# Altium PCB BLDC_PCB.PcbDoc
Units mm, origin at the board's own origin, x right, y up, seen from the top; angles counter-clockwise.
Board outline 85 x 100 mm, 2 copper layers (Top Layer, Bottom Layer); 61 components, 40 nets, 155 pads, 0 vias.
Unrouted connection lines stored in the file: 102.
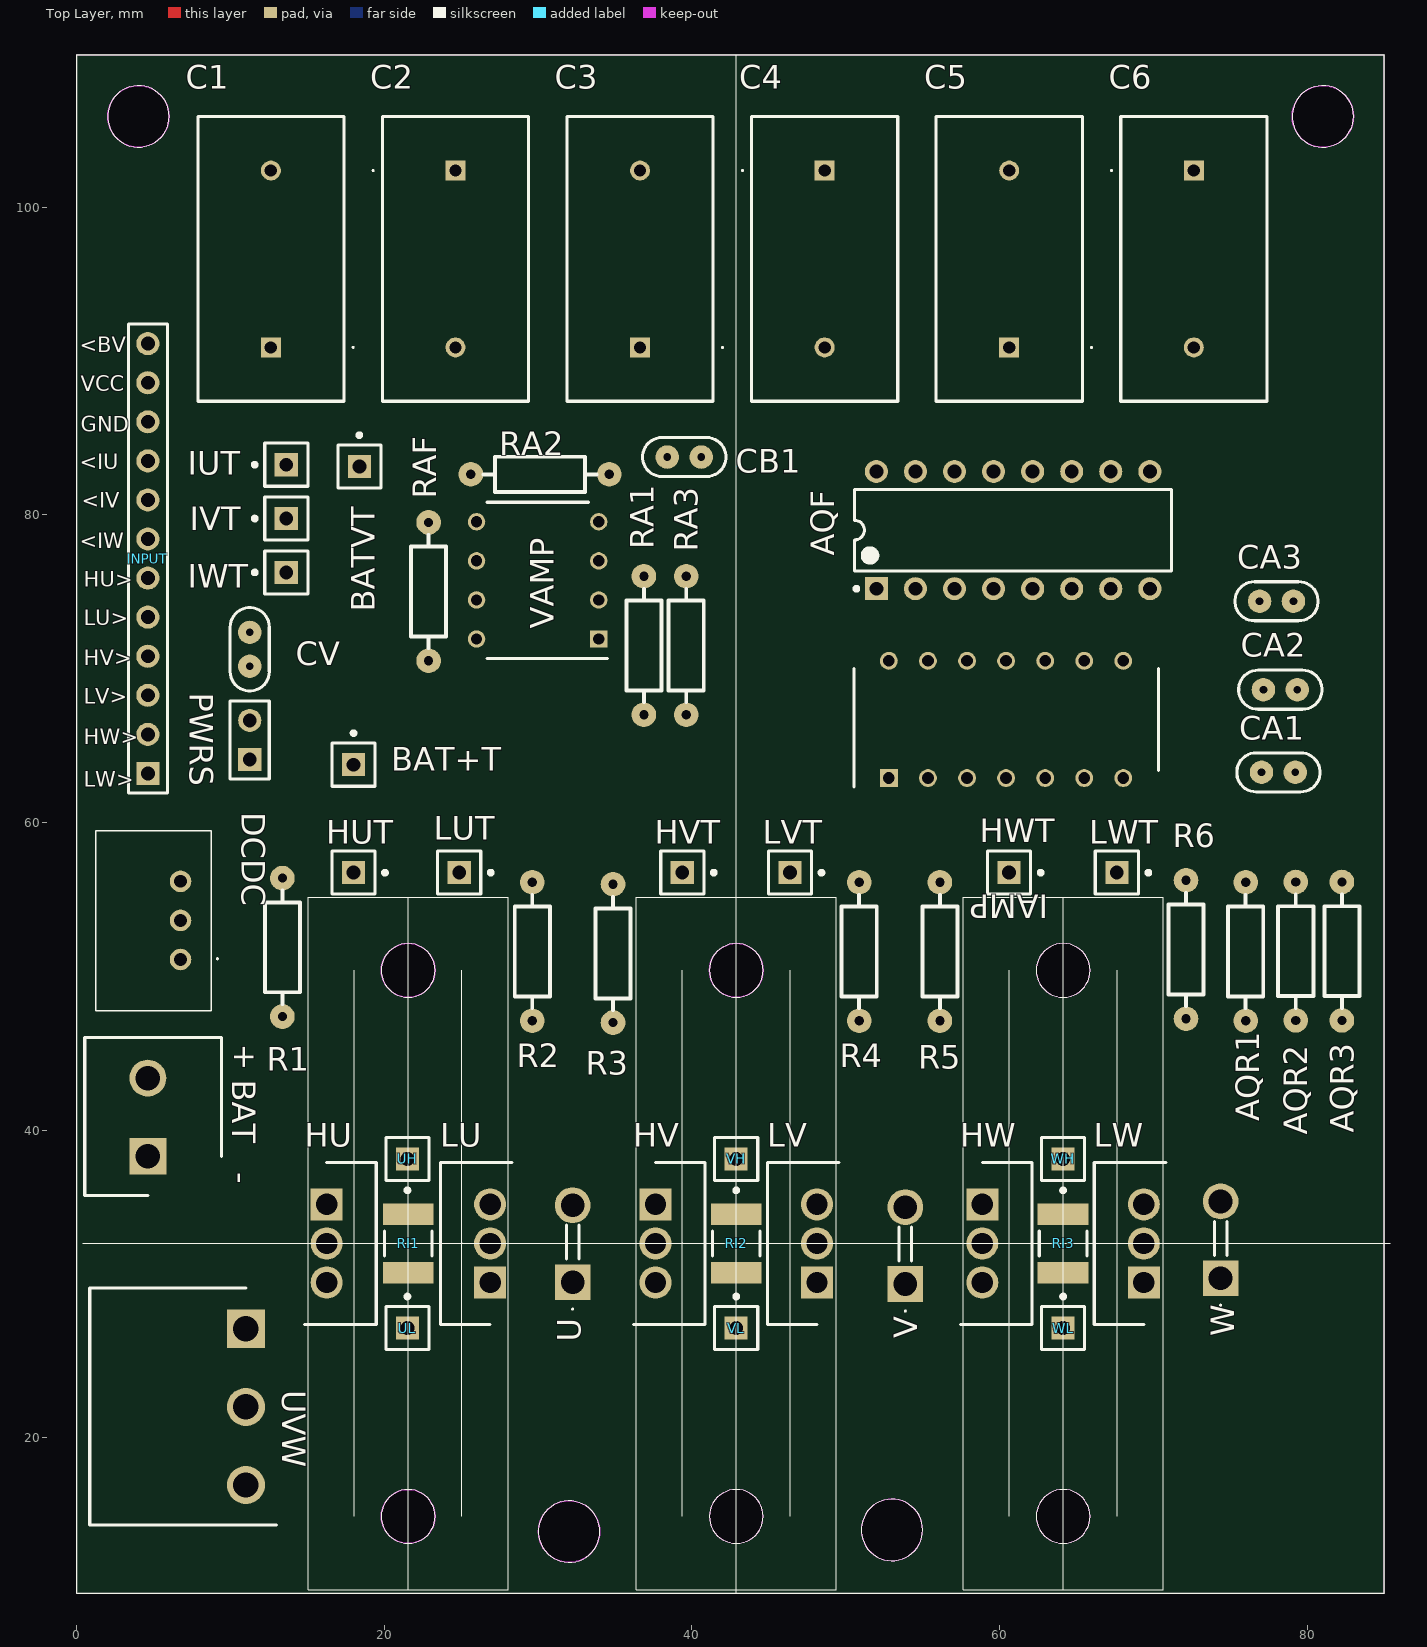
[diagram p0: Top Layer view]
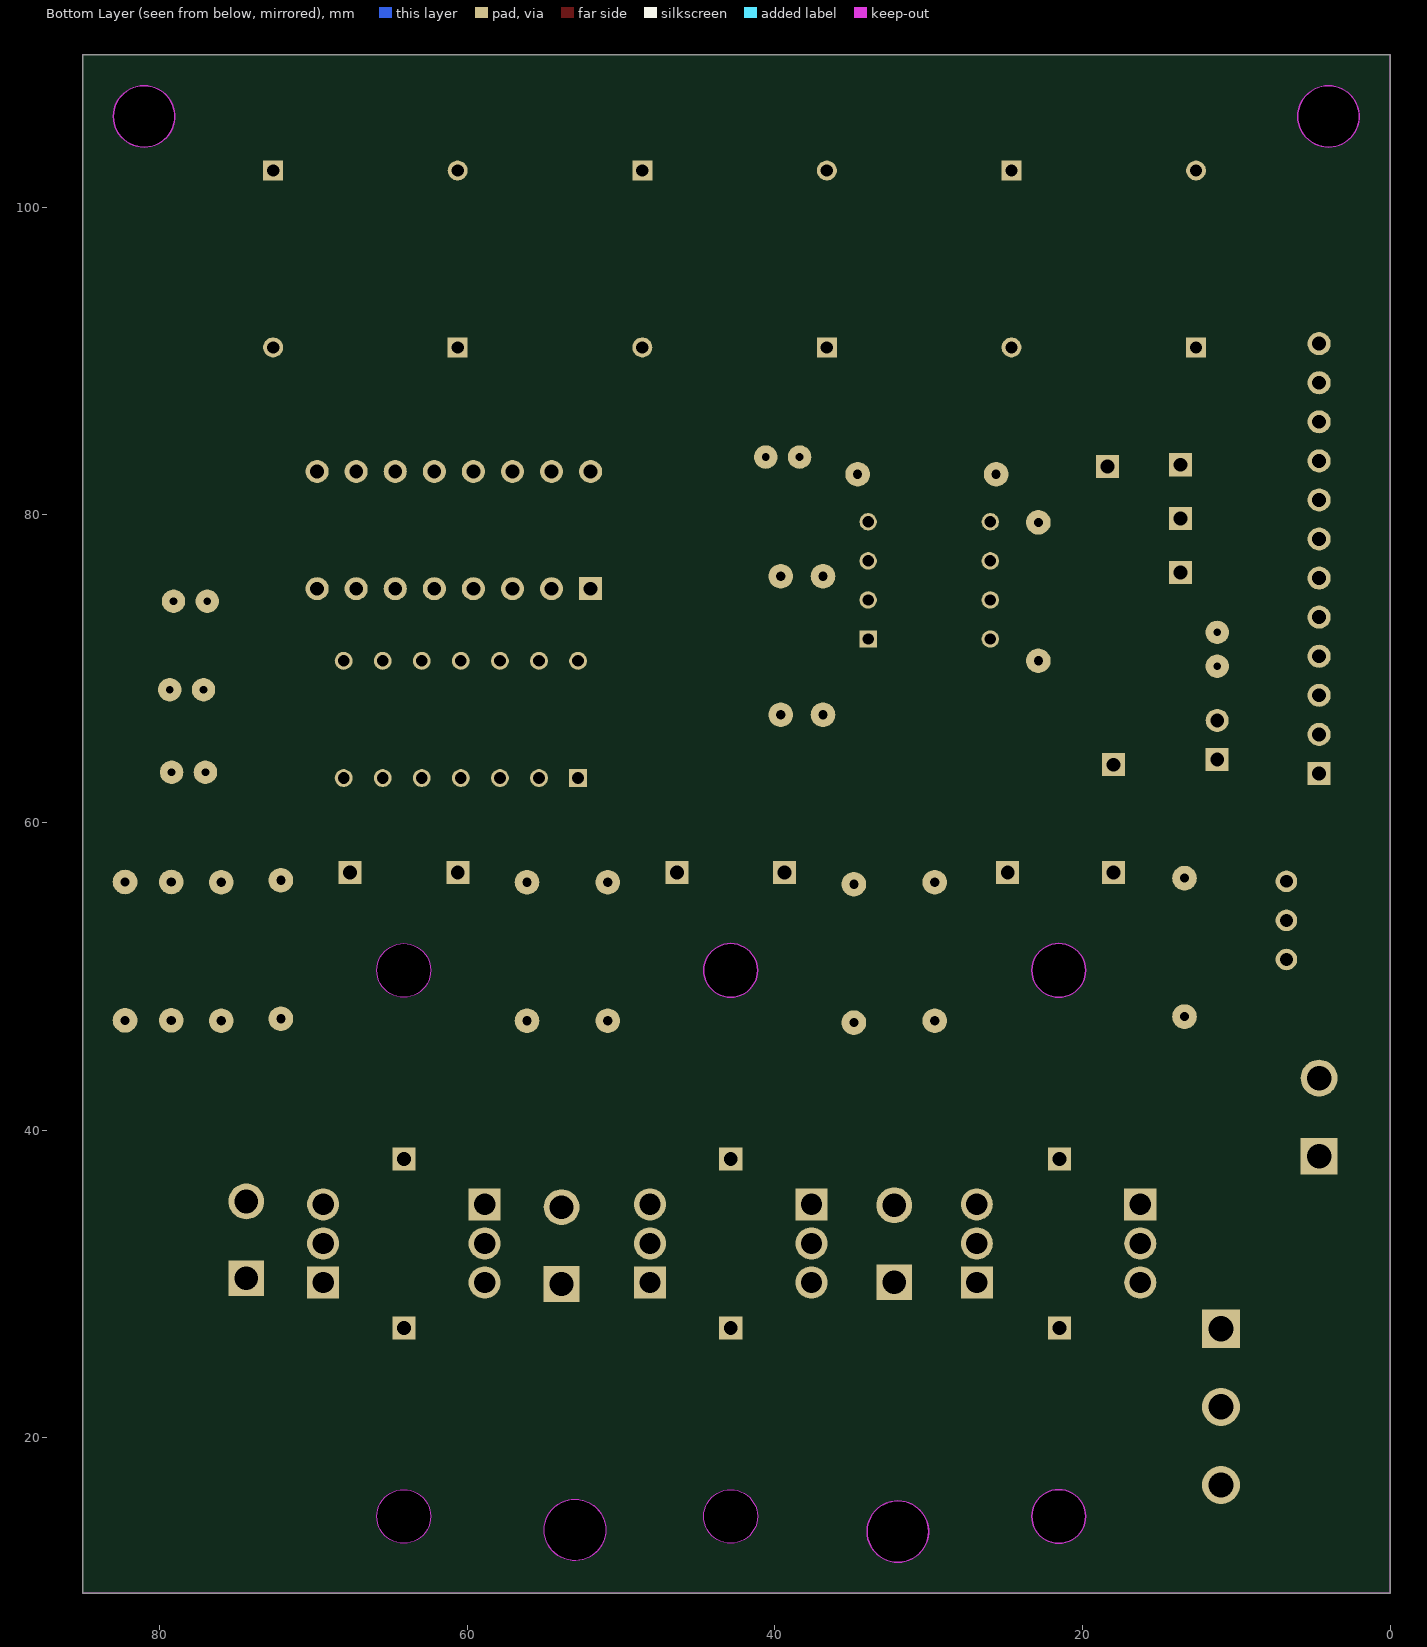
[diagram p1: Bottom Layer view, seen from below]

## Layer stack, top to bottom
Top Solder: solder mask 0.0102, Solder Resist, Dk 3.5
Top Layer: signal copper 0.0356
Dielectric 1: dielectric 0.32, FR-4, Dk 4.8
Bottom Layer: signal copper 0.0356
Bottom Solder: solder mask 0.0102, Solder Resist, Dk 3.5

## Board outline
0.013,9.893 0.013,109.893 85.013,109.893 85.013,9.893
cut-out: 62.381,14.875 ccw(c64.131,14.875) 64.131,13.125 ccw(c64.131,14.875) 65.881,14.875 ccw(c64.131,14.875) 64.131,16.625 ccw(c64.131,14.875)
cut-out: 41.131,14.875 ccw(c42.881,14.875) 42.881,13.125 ccw(c42.881,14.875) 44.631,14.875 ccw(c42.881,14.875) 42.881,16.625 ccw(c42.881,14.875)
cut-out: 21.548,13.125 cw(c21.548,14.875) 19.798,14.875 cw(c21.548,14.875) 21.548,16.625 cw(c21.548,14.875) 23.298,14.875 cw(c21.548,14.875)
cut-out: 62.381,50.375 ccw(c64.131,50.375) 64.131,48.625 ccw(c64.131,50.375) 65.881,50.375 ccw(c64.131,50.375) 64.131,52.125 ccw(c64.131,50.375)
cut-out: 42.881,48.625 cw(c42.881,50.375) 41.131,50.375 cw(c42.881,50.375) 42.881,52.125 cw(c42.881,50.375) 44.631,50.375 cw(c42.881,50.375)
cut-out: 21.548,48.625 cw(c21.548,50.375) 19.798,50.375 cw(c21.548,50.375) 21.548,52.125 cw(c21.548,50.375) 23.298,50.375 cw(c21.548,50.375)
cut-out: 51,14 ccw(c53,14) 53,12 ccw(c53,14) 55,14 ccw(c53,14) 53,16 ccw(c53,14)
cut-out: 32.013,11.893 cw(c32.013,13.893) 30.013,13.893 cw(c32.013,13.893) 32.013,15.893 cw(c32.013,13.893) 34.013,13.893 cw(c32.013,13.893)
cut-out: 81.013,103.893 cw(c81.013,105.893) 79.013,105.893 cw(c81.013,105.893) 81.013,107.893 cw(c81.013,105.893) 83.013,105.893 cw(c81.013,105.893)
cut-out: 4.013,103.893 cw(c4.013,105.893) 2.013,105.893 cw(c4.013,105.893) 4.013,107.893 cw(c4.013,105.893) 6.013,105.893 cw(c4.013,105.893)

## Design rules (kind name [scope] priority, off if disabled: settings)
Clearance [All] p1: gap=0.25 ignorepadtopadclearanceinfootprint=FALSE
PolygonConnect [All] p1: connectstyle=Relief reliefconductorwidth=0.254 reliefentries=4 polygonreliefangle="90 Angle" airgapwidth=0.254
RoutingVias [All] p1: holewidth=0.711 width=1.27 viastyle="Through Hole" minholewidth=0.711 minwidth=1.27 maxholewidth=0.711 maxwidth=1.27
SolderMaskExpansion [All] p1: expansion=0.102 istentingtop=FALSE
Width Width-BAT [InNet('BAT+')] p1: maxlimit=5 minlimit=1 preferedwidth=2
Width Width-BAT_1 [InNet('BAT-')] p2: maxlimit=5 minlimit=1 preferedwidth=2
Width [All] p3: maxlimit=5 minlimit=0.5 preferedwidth=0.5
30 further rules are at their usual default settings.

## Components (designator, comment, footprint, x,y, rotation, side; value= is the part's Value field where it differs from the comment)
AQF "Res Pack2" DIP-16 60.875,79 r90 top value=22K
AQR1 "Res2" "RS 1/4W" 75.994,51.608 r90 top value=1.1K
AQR2 "Res2" "RS 1/4W" 79.25,51.625 r90 top value=1.1K
AQR3 "Res2" "RS 1/4W" 82.25,51.625 r90 top value=1.1K
BAT "1757242" SHDR2W100P0X508_1X2_1016X860X1250P 4.625,38.295 r90 top
BAT+T "Test" PIN1 18,63.75 r0 top
BATVT "Test" PIN1 18.375,83.125 r0 top
C1 "SCMR22H155PSBB0" SCMR22H155PSBB0 12.625,90.875 r180 top
C2 "SCMR22H155PSBB0" SCMR22H155PSBB0 24.625,102.375 r0 top
C3 "SCMR22H155PSBB0" SCMR22H155PSBB0 36.625,90.875 r180 top
C4 "SCMR22H155PSBB0" SCMR22H155PSBB0 48.625,102.375 r0 top
C5 "SCMR22H155PSBB0" SCMR22H155PSBB0 60.625,90.875 r180 top
C6 "SCMR22H155PSBB0" SCMR22H155PSBB0 72.625,102.375 r0 top
CA1 "Cap" "CC 2.2*5" 78.125,63.25 r180 top value=100pF
CA2 "Cap" "CC 2.2*5" 78.25,68.625 r180 top value=100pF
CA3 "Cap" "CC 2.2*5" 78,74.375 r180 top value=100pF
CB1 "Cap" "CC 2.2*5" 39.5,83.75 r0 top value=47UF
CV "Cap" "CC 2.2*5" 11.25,71.25 r90 top value=47UF
DCDC "TSR_1-2450E" TSR12450E 6.75,51.085 r90 top
HU "IRL520PBF" TO254P465X1024X2050-3P 16.25,35.165 r270 top
HUT "Test" PIN1 17.994,56.733 r270 top
HV "IRL520PBF" TO254P465X1024X2050-3P 37.625,35.165 r270 top
HVT "Test" PIN1 39.369,56.733 r270 top
HW "IRL520PBF" TO254P465X1024X2050-3P 58.875,35.165 r270 top
HWT "Test" PIN1 60.619,56.733 r270 top
IAMP "LM324N" DIP762W56P254L1980H508Q14N 60.42,66.69 r90 top
INPUT "Header 12" HDR1X12 4.625,63.18 r90 top
IUT "Test" PIN1 13.625,83.25 r90 top
IVT "Test" PIN1 13.625,79.75 r90 top
IWT "Test" PIN1 13.625,76.25 r90 top
LU "IRL520PBF" TO254P465X1024X2050-3P 26.875,30.085 r90 top
LUT "Test" PIN1 24.869,56.733 r270 top
LV "IRL520PBF" TO254P465X1024X2050-3P 48.125,30.085 r90 top
LVT "Test" PIN1 46.369,56.733 r270 top
LW "IRL520PBF" TO254P465X1024X2050-3P 69.375,30.085 r90 top
LWT "Test" PIN1 67.619,56.733 r270 top
PWRS "Header 2" HDR1X2 11.25,64.085 r90 top
R1 "Res2" "RS 1/4W" 13.375,51.875 r90 top value=4.7K
R2 "Res2" "RS 1/4W" 29.619,51.608 r90 top value=4.7K
R3 "Res2" "RS 1/4W" 34.869,51.483 r90 top value=4.7K
R4 "Res2" "RS 1/4W" 50.869,51.608 r90 top value=4.7K
R5 "Res2" "RS 1/4W" 56.119,51.608 r90 top value=4.7K
R6 "Res2" "RS 1/4W" 72.119,51.733 r90 top value=4.7K
RA1 "Res2" "RS 1/4W" 36.875,71.5 r90 top value=100K
RA2 "Res2" "RS 1/4W" 30.125,82.625 r0 top value=100K
RA3 "Res2" "RS 1/4W" 39.625,71.5 r270 top value=10K
RAF "Res2" "RS 1/4W" 22.875,75 r270 top value=10K
RI1 "Res2" 1812 21.548,32.625 r270 top value=0.01ohm
RI2 "Res2" 1812 42.878,32.625 r270 top value=0.01ohm
RI3 "Res2" 1812 64.125,32.625 r270 top value=0.01ohm
U "2376595-2" 23765952 32.244,30.108 r90 top
UH "Socket" PIN1 21.5,38.125 r180 top
UL "Socket" PIN1 21.5,27.125 r0 top
UVW "1785955" SHDRRA3W103P0X508_1X3_1524X1200X872P 11,27.08 r90 top
V "2376595-2" 23765952 53.869,29.983 r90 top
VAMP "OPA445AP" DIP794W53P254L959H508Q8N 29.97,75.73 r180 top
VH "Socket" PIN1 42.875,38.125 r180 top
VL "Socket" PIN1 42.875,27.125 r0 top
W "2376595-2" 23765952 74.369,30.358 r90 top
WH "Socket" PIN1 64.125,38.125 r180 top
WL "Socket" PIN1 64.125,27.125 r0 top

## Footprints (in the part's own frame and the unit in brackets; to place one, negate y for a bottom-side part, rotate by r counter-clockwise, add the part's x,y. Pads: shape width x height; smd on the part's side, far side on the other; paste and mask are expansions set on the pad)
1812 [mm] "Chip Capacitor, Body 4.5x3.2mm, IPC High Density"
  rect 1.4x3.3 smd: 1(-1.9,0) 2(1.9,0)
  silkscreen extent -0.8,-1.55 0.8,1.55, body extent -2.4,-1.7 2.4,1.7, height 1.4
23765952 [mm]
  rect 2.325x2.325 hole 1.55: 1(0,0)
  round 2.325 hole 1.55: 1(5,0)
  silkscreen extent -1.8,-0.4 3.7,0.4, body extent -0.67,-0.67 5.68,0.67, height 10.75
"CC 2.2*5" [mm] "脚距2.2mm直径5mm"
  round 1.524 hole 0.5: 1(-1.1,0) 2(1.1,0)
  silkscreen extent -2.71,-1.27 2.71,1.27, body extent -2.4,-0.92 2.4,0.92, height 4.8
DIP762W56P254L1980H508Q14N [mm]
  rect 1.16x1.16 hole 0.76: 1(-3.81,7.62)
  round 1.16 hole 0.76: 2(-3.81,5.08) 3(-3.81,2.54) 4(-3.81,0) 5(-3.81,-2.54) 6(-3.81,-5.08) 7(-3.81,-7.62) 8(3.81,-7.62) 9(3.81,-5.08) 10(3.81,-2.54) 11(3.81,0) 12(3.81,2.54) 13(3.81,5.08) 14(3.81,7.62)
  silkscreen extent -4.39,-9.9 3.3,9.9, body extent -3.95,-9.9 3.95,9.9, height 5.08
DIP794W53P254L959H508Q8N [mm]
  rect 1.13x1.13 hole 0.73: 1(-3.97,3.81)
  round 1.13 hole 0.73: 2(-3.97,1.27) 3(-3.97,-1.27) 4(-3.97,-3.81) 5(3.97,-3.81) 6(3.97,-1.27) 7(3.97,1.27) 8(3.97,3.81)
  silkscreen extent -4.53,-5.08 3.3,5.08, body extent -4.1,-4.64 4.1,4.64, height 4.21
DIP-16 [mm] "DIP; 16 Leads; Row Spacing 7.62 mm; Pitch 2.54 mm"
  rect 1.5x1.5 hole 0.9: 1(-3.81,8.89)
  round 1.5 hole 0.9: 2(-3.81,6.35) 3(-3.81,3.81) 4(-3.81,1.27) 5(-3.81,-1.27) 6(-3.81,-3.81) 7(-3.81,-6.35) 8(-3.81,-8.89) 9(3.81,-8.89) 10(3.81,-6.35) 11(3.81,-3.81) 12(3.81,-1.27) 13(3.81,1.27) 14(3.81,3.81) 15(3.81,6.35) 16(3.81,8.89)
  silkscreen extent -3.93,-10.3 2.65,10.31, body extent -3.6,-10.28 3.6,10.28, height 5.08
HDR1X2 [mm] "Connector; Header; 2 Position"
  rect 1.5x1.5 hole 0.9: 1(0,0)
  round 1.5 hole 0.9: 2(2.54,0)
  silkscreen extent -1.27,-1.27 3.81,1.27
HDR1X12 [mm] "Connector; Header; 12 Position"
  rect 1.5x1.5 hole 0.9: 1(0,0)
  round 1.5 hole 0.9: 2(2.54,0) 3(5.08,0) 4(7.62,0) 5(10.16,0) 6(12.7,0) 7(15.24,0) 8(17.78,0) 9(20.32,0) 10(22.86,0) 11(25.4,0) 12(27.94,0)
  silkscreen extent -1.27,-1.27 29.21,1.27
PIN1 [mm] "Connector; Plug"
  rect 1.5x1.5 hole 0.9: 1(0,0)
  silkscreen extent -1.4,-1.4 1.4,2.17
"RS 1/4W" [mm] "直插色环电阻，脚距9mm，直径2.3mm"
  round 1.6 hole 0.6: 1(-4.5,0) 2(4.5,0)
  silkscreen extent -3.68,-1.14 3.68,1.14, body extent -4.72,-1.16 4.73,1.16, height 2.32
SCMR22H155PSBB0 [mm]
  rect 1.3x1.3 hole 0.8: 1(0,0)
  round 1.3 hole 0.8: 2(0,-11.5)
  silkscreen extent -5.4,-15 4.75,3.5, body extent -4.75,-15 4.75,3.5, height 26.1
SHDR2W100P0X508_1X2_1016X860X1250P [mm]
  rect 2.4x2.4 hole 1.6: 1(0,0)
  round 2.4 hole 1.6: 2(5.08,0)
  silkscreen extent -2.54,-4.8 7.72,4.1, body extent -2.54,-4.8 7.62,3.8, height 12.5
SHDRRA3W103P0X508_1X3_1524X1200X872P [mm]
  rect 2.475x2.475 hole 1.65: 1(0,0)
  round 2.475 hole 1.65: 2(-5.08,0) 3(-10.16,0)
  silkscreen extent -12.75,-2 2.64,10.15, body extent -12.7,-2 2.54,10, height 8.72
TO254P465X1024X2050-3P [mm]
  rect 2.085x2.085 hole 1.39: 1(0,0)
  round 2.085 hole 1.39: 2(2.54,0) 3(5.08,0)
  silkscreen extent -2.72,-1.43 7.8,3.23, body extent -2.58,-1.43 7.66,3.22, height 18.77
TSR12450E [mm]
  round 1.4 hole 0.83: 1(0,0) 2(2.54,0) 3(5.08,0)
  silkscreen extent -3.32,-2.45 8.38,5.5, body extent -3.69,-1.78 7.99,5.72, height 9.88

## Part data
AQF: "Isolated Resistor Network - Parts", Code_JEDEC=MO-001-AC, LatestRevisionDate=17-Jul-2002, LatestRevisionNote="Re-released for DXP Platform.", PackageReference=DIP-16, Published=24-Mar-1999, Publisher="Altium Limited", Sim Note="Enter the Resistance value into parameter field."
AQR1 AQR2 AQR3 R1 R2 R3 R4 R5 R6 RA1 RA2 RA3 RAF RI1 RI2 RI3: "Resistor", LatestRevisionDate=17-Jul-2002, LatestRevisionNote="Re-released for DXP Platform.", PackageDescription="Axial Device, Thru-Hole; 2 Leads; 0.4 in Pin Spacing", PackageReference=AXIAL-0.4, Published=8-Jun-2000, Publisher="Altium Limited"
BAT: library part OQ025A000000G, "Connector", Manufacturer_Name=Amphenol, Mouser Part Number=523-OQ025A000000G, Datasheet Link=https://media.digikey.com/pdf/Data%20Sheets/Amphenol%20PDFs/OQxx5A00xxxxG.pdf, Height=12.5mm, Manufacturer_Part_Number=OQ025A000000G, Mouser Price/Stock=https://www.mouser.co.uk/ProductDetail/Amphenol-Anytek/OQ025A000000G?qs=T3oQrply3y%2FPbDIhJzFZ1w%3D%3D
BAT+T BATVT HUT HVT HWT IUT IVT IWT LUT LVT LWT U V W: library part Socket, "Socket", LatestRevisionDate=17-Jul-2002, LatestRevisionNote="Re-released for DXP Platform.", Publisher="Altium Limited"
C1 C2 C3 C4 C5 C6: "Capacitor Polarised", Manufacturer_Name=AVX, Mouser Part Number=581-SCMR22H155PSBB0, Arrow Part Number=SCMR22H155PSBB0, Arrow Price/Stock=https://www.arrow.com/en/products/scmr22h155psbb0/avx, Datasheet Link=https://datasheets.avx.com/AVX-SCM.pdf, Height=26mm, Manufacturer_Part_Number=SCMR22H155PSBB0, Mouser Price/Stock=https://www.mouser.com/Search/Refine.aspx?Keyword=581-SCMR22H155PSBB0
CA1 CA2 CA3 CB1 CV: "Capacitor", LatestRevisionDate=17-Jul-2002, LatestRevisionNote="Re-released for DXP Platform.", PackageDescription="Radial Cap, Thru-Hole; 2 Leads; 0.3 in Pin Spacing", PackageReference=RAD-0.3, Published=8-Jun-2000, Publisher="Altium Limited"
DCDC: "Power Supply", Manufacturer_Name="Traco Power", Manufacturer_Part_Number="TSR 1-2450E", Mouser Part Number=495-TSR1-2450E, Datasheet Link=https://tracopower.com/tsr1e-datasheet/, Height=10.6mm, Mouser Price/Stock=https://www.mouser.co.uk/ProductDetail/TRACO-Power/TSR-1-2450E?qs=vmHwEFxEFR%2FlQnbAtEoeVA%3D%3D
HU HV HW LU LV LW: library part NMOS-2, "N-Channel Power MOSFET", ComponentLink1Description="Manufacturer Link", ComponentLink1URL=http://www.irf.com/, DatasheetVersion=PD-9.814, LatestRevisionDate=17-Jul-2002, LatestRevisionNote="Re-released for DXP Platform.", Note="Pin 2 is electrically connected to pin 4.", PackageDescription="TO, Thru-Hole, Vertical, Heatsink Mounted; 3 In-Line Leads; Pitch 2.54 mm", PackageReference=TO-220AB, PackageVersion=Feb-1997, Published=8-Jun-2000, Publisher="Altium Limited"
IAMP: "Quadruple Operational Amplifier", ComponentLink1Description="Manufacturer Link", ComponentLink1URL=http://www.ti.com/, ComponentLink2Description=Datasheet, ComponentLink2URL=http://www-s.ti.com/sc/ds/lm324.pdf, DatasheetVersion=Feb-1997, LatestRevisionDate=04-Mar-2005, LatestRevisionNote="Stylized 3D Model Added.", PackageDescription="DIP; 14 Leads; Row Spacing 7.62 mm; Pitch 2.54 mm", PackageReference=N014, PackageVersion=Oct-1995, Published=16-Jan-2001, Publisher="Altium Limited"
INPUT: "Header, 12-Pin", LatestRevisionDate=17-Jul-2002, LatestRevisionNote="Re-released for DXP Platform.", Publisher="Altium Limited"
PWRS: "Header, 2-Pin", LatestRevisionDate=17-Jul-2002, LatestRevisionNote="Re-released for DXP Platform.", Publisher="Altium Limited"
UVW: library part 1759020, "Connector", Manufacturer_Name="Phoenix Contact", Mouser Part Number=651-1759020, Arrow Part Number=1759020, Arrow Price/Stock=https://www.arrow.com/en/products/1759020/phoenix-contact, Datasheet Link=http://www.phoenixcontact.com/de/produkte/1759020/pdf, Height=8.72mm, Manufacturer_Part_Number=1759020, Mouser Price/Stock=https://www.mouser.co.uk/ProductDetail/Phoenix-Contact/1759020?qs=cyzODkzcbwBhDS9bIpwSxQ%3D%3D
VAMP: library part LM101AJG, "High Performance Operational Amplifier", ComponentAvailability=Obsolete, ComponentLink1Description="Manufacturer Link", ComponentLink1URL=http://www.ti.com/, ComponentLink2Description=Datasheet, ComponentLink2URL=http://focus.ti.com/lit/ds/slos061/slos061.pdf, ComponentLink3Description="Discontinuation Notice", ComponentLink3URL=http://focus.ti.com/pdfs/mltry/obsolete.pdf, DatasheetVersion=Sep-1990, LatestRevisionDate=04-Mar-2005, LatestRevisionNote="Stylized 3D Model Added.", PackageDescription="DIP; 8 Leads; Row Spacing 7.62 mm; Pitch 2.54 mm", PackageReference=JG008, PackageVersion=Jan-1995, Published=16-Jan-2001, Publisher="Altium Limited"
UH UL VH VL WH WL: LatestRevisionDate=17-Jul-2002, LatestRevisionNote="Re-released for DXP Platform.", Publisher="Altium Limited"

## Nets (pads, with @x,y where several pads share a name; then routed paths per layer and width w, separated by ;. In a path a pad name is that pad's centre, name@x,y a point inside that pad or via, vN(x,y) a via of type N, cw(c..) or ccw(c..) an arc to the next point about the centre after c; other vN are vias at no path point)
BAT+: BAT+T.1 BAT.2 C1.1 CB1.1 DCDC.1 HU.2 HV.2 HW.2 RA2.2 VAMP.4
BAT-: BAT.1 C6.2 CB1.2 DCDC.2 RA1.2 RA3.1 RI1.2 RI2.2 RI3.2 UL.1 VAMP.7 VL.1 WL.1
GND: AQR1.1 AQR2.1 AQR3.1 CA1.1 CA2.1 CA3.1 CV.1 IAMP.11 INPUT.10
IU: AQF.16 CA1.2 IAMP.1 INPUT.9 IUT.1
IV: AQF.15 CA2.2 IAMP.7 INPUT.8 IVT.1
IW: AQF.14 CA3.2 IAMP.8 INPUT.7 IWT.1
NetAQF_1: AQF.1 AQR1.2 IAMP.2
NetAQF_2: AQF.2 AQR2.2 IAMP.6
NetAQF_3: AQF.3 AQR3.2 IAMP.9
NetAQF_11: AQF.11 IAMP.10
NetAQF_12: AQF.12 IAMP.5
NetAQF_13: AQF.13 IAMP.3
NetBATVT_1: BATVT.1 INPUT.12 RAF.1 VAMP.6
NetC1_2: C1.2 C2.1
NetC2_2: C2.2 C3.1
NetC3_2: C3.2 C4.1
NetC4_2: C4.2 C5.1
NetC5_2: C5.2 C6.1
NetDCDC_3: DCDC.3 PWRS.1
NetHU_1: HU.1 HUT.1 R1.2
NetHV_1: HV.1 HVT.1 R3.2
NetHW_1: HW.1 HWT.1 R5.2
NetINPUT_1: INPUT.1 R6.1
NetINPUT_2: INPUT.2 R5.1
NetINPUT_3: INPUT.3 R4.1
NetINPUT_4: INPUT.4 R3.1
NetINPUT_5: INPUT.5 R2.1
NetINPUT_6: INPUT.6 R1.1
NetLU_1: LU.1 LUT.1 R2.2
NetLU_3: LU.3 RI1.1 UH.1
NetLV_1: LV.1 LVT.1 R4.2
NetLV_3: LV.3 RI2.1 VH.1
NetLW_1: LW.1 LWT.1 R6.2
NetLW_3: LW.3 RI3.1 WH.1
NetRA1_1: RA1.1 RAF.2 VAMP.2
NetRA2_1: RA2.1 RA3.2 VAMP.3
UO: HU.3 LU.2 U.1 UVW.1
VCC: CV.2 IAMP.4 INPUT.11 PWRS.2
VO: HV.3 LV.2 UVW.2 V.1
WO: HW.3 LW.2 UVW.3 W.1
pads on no net: AQF.4 AQF.5 AQF.6 AQF.7 AQF.8 AQF.9 AQF.10 IAMP.12 IAMP.13 IAMP.14 VAMP.1 VAMP.5 VAMP.8

## Polygon pours and split planes (outlines as drawn)
no net on Bottom Layer "NONET_L02_P016" (solid, remove dead copper, pour order 16): 0.013,109.893
no net on Bottom Layer "NONET_L02_P000" (solid, pour order 0): 0.013,9.893

## Keep-outs
Keep-Out Layer:
  circle w0.013: c21.548,50.375 r1.75
  circle w0.013: c42.881,50.375 r1.75
  circle w0.013: c64.131,50.375 r1.75
  circle w0.013: c64.131,14.875 r1.75
  circle w0.013: c42.881,14.875 r1.75
  circle w0.013: c21.548,14.875 r1.75
  circle w0.013: c32.013,13.893 r2
  circle w0.013: c53,14 r2
  circle w0.013: c81.013,105.893 r2
  circle w0.013: c4.013,105.893 r2
  lines w0.013: 0.013,9.893 0.013,109.893 85.013,109.893 85.013,9.893 0.013,9.893

## Silkscreen, mask and mechanical layers (free items; w line width, h text height)
Top Overlay:
  circle w0.013: c21.548,50.375 r1.75
  circle w0.013: c42.881,50.375 r1.75
  circle w0.013: c64.131,50.375 r1.75
  circle w0.013: c64.131,14.875 r1.75
  circle w0.013: c42.881,14.875 r1.75
  circle w0.013: c21.548,14.875 r1.75
  circle w0.013: c32.013,13.893 r2
  circle w0.013: c53,14 r2
  circle w0.013: c81.013,105.893 r2
  circle w0.013: c4.013,105.893 r2
  circle w0.006: c67.631,32.625 r0.003
  circle w0.006: c60.631,32.625 r0.003
  circle w0.006: c46.381,32.625 r0.003
  circle w0.006: c39.381,32.625 r0.003
  circle w0.006: c25.048,32.625 r0.003
  circle w0.006: c18.048,32.625 r0.003
  circle w0.006: c67.631,32.625 r0.003
  circle w0.006: c46.381,32.625 r0.003
  circle w0.006: c25.048,32.625 r0.003
  circle w0.006: c60.631,32.625 r0.003
  circle w0.006: c39.381,32.625 r0.003
  circle w0.006: c18.048,32.625 r0.003
  circle w0.006: c64.131,32.625 r0.003
  circle w0.006: c21.631,32.625 r0.003
  circle w0.006: c42.881,32.625 r0.003
  circle w0.013: c21.548,50.375 r1.75
  circle w0.013: c42.881,50.375 r1.75
  circle w0.013: c64.131,50.375 r1.75
  circle w0.013: c64.131,14.875 r1.75
  circle w0.013: c42.881,14.875 r1.75
  circle w0.013: c21.548,14.875 r1.75
  lines w0.013: 18.048,14.875 18.048,50.375 ; 21.548,10.125 21.548,55.125 ; 21.548,14.875 21.548,50.375 ; 25.048,14.875 25.048,50.375 ; 39.381,14.875 39.381,50.375 ; 46.381,14.875 46.381,50.375 ; 60.631,14.875 60.631,50.375 ; 64.131,10.125 64.131,55.125 ; 64.131,14.875 64.131,50.375 ; 67.631,14.875 67.631,50.375 ; 0.013,9.893 0.013,109.893 85.013,109.893 85.013,9.893 0.013,9.893 ; 0.381,32.625 85.381,32.625 42.881,32.625 0.381,32.625 ; 15.048,10.125 15.048,55.125 28.048,55.125 28.048,10.125 15.048,10.125 ; 36.381,10.125 49.381,10.125 49.381,55.125 36.381,55.125 36.381,10.125 ; 42.888,9.893 42.888,109.893 42.888,9.893 ; 57.631,10.125 57.631,55.125 70.631,55.125 70.631,10.125 57.631,10.125
  text "<BV" at 0.2,90.575 h1
  text "VCC" at 0.275,88.025 h1
  text "GND" at 0.275,85.4 h1
  text "<IU" at 0.2,82.95 h1
  text "<IV" at 0.325,80.45 h1
  text "<IW" at 0.2,77.825 h1
  text "HU>" at 0.45,75.325 h1
  text "LU>" at 0.45,72.825 h1
  text "HV>" at 0.45,70.2 h1
  text "LV>" at 0.45,67.7 h1
  text "HW>" at 0.45,65.075 h1
  text "LW>" at 0.45,62.325 h1
  text "+" at 10.25,45.621 h1.52 r270
  text "-" at 9.992,37.246 h1.52 r270